# Altium PCB 软排转接.PcbDoc
Units mm, origin at the board's own origin, x right, y up, seen from the top; angles counter-clockwise.
Board outline 32 x 73.79 mm, 2 copper layers (Top Layer, Bottom Layer); 11 components, 73 nets, 188 pads, 112 vias.
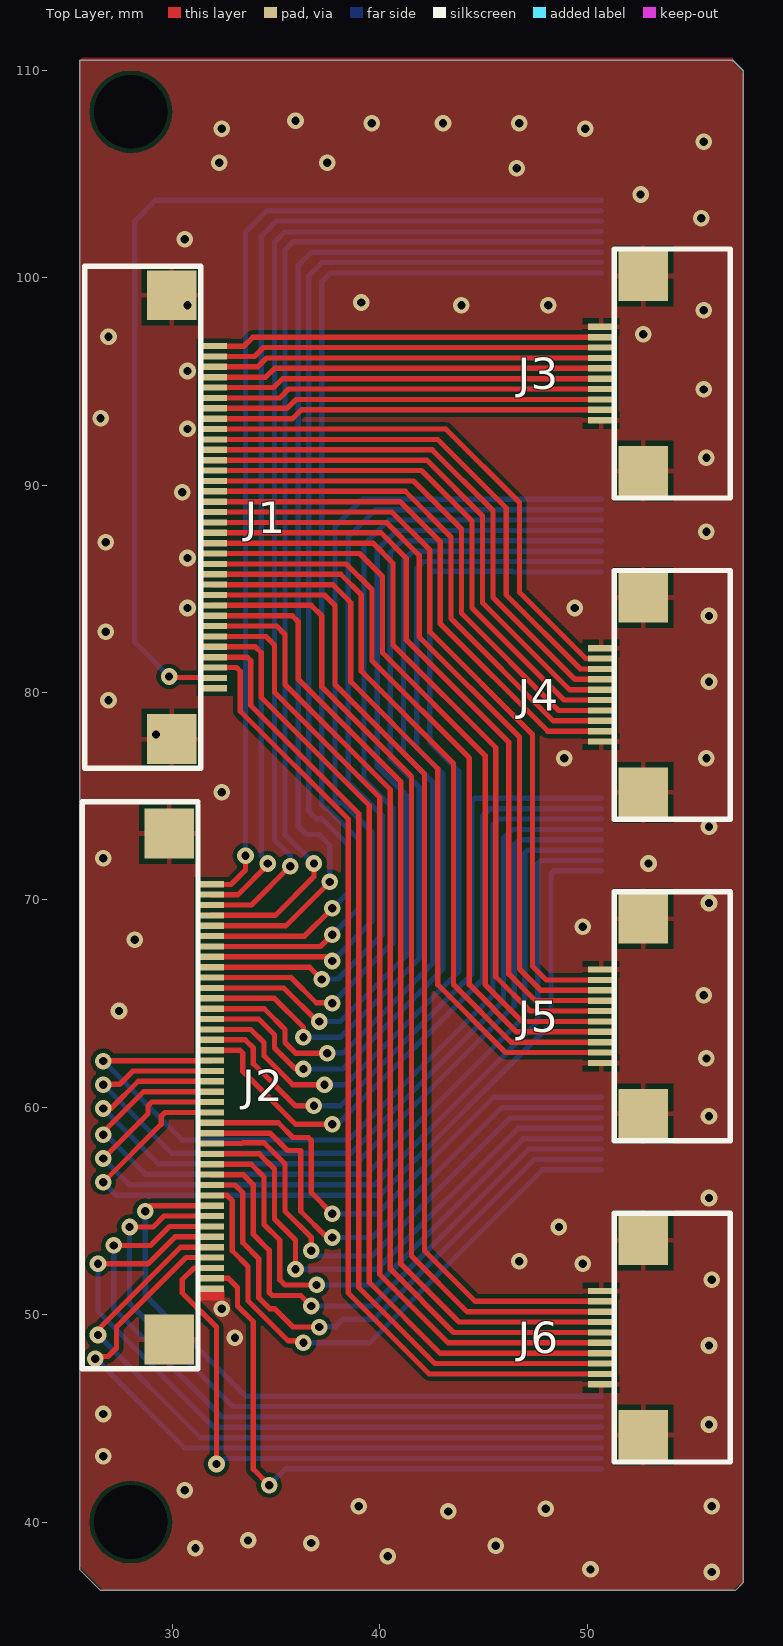
[diagram p0: Top Layer view]
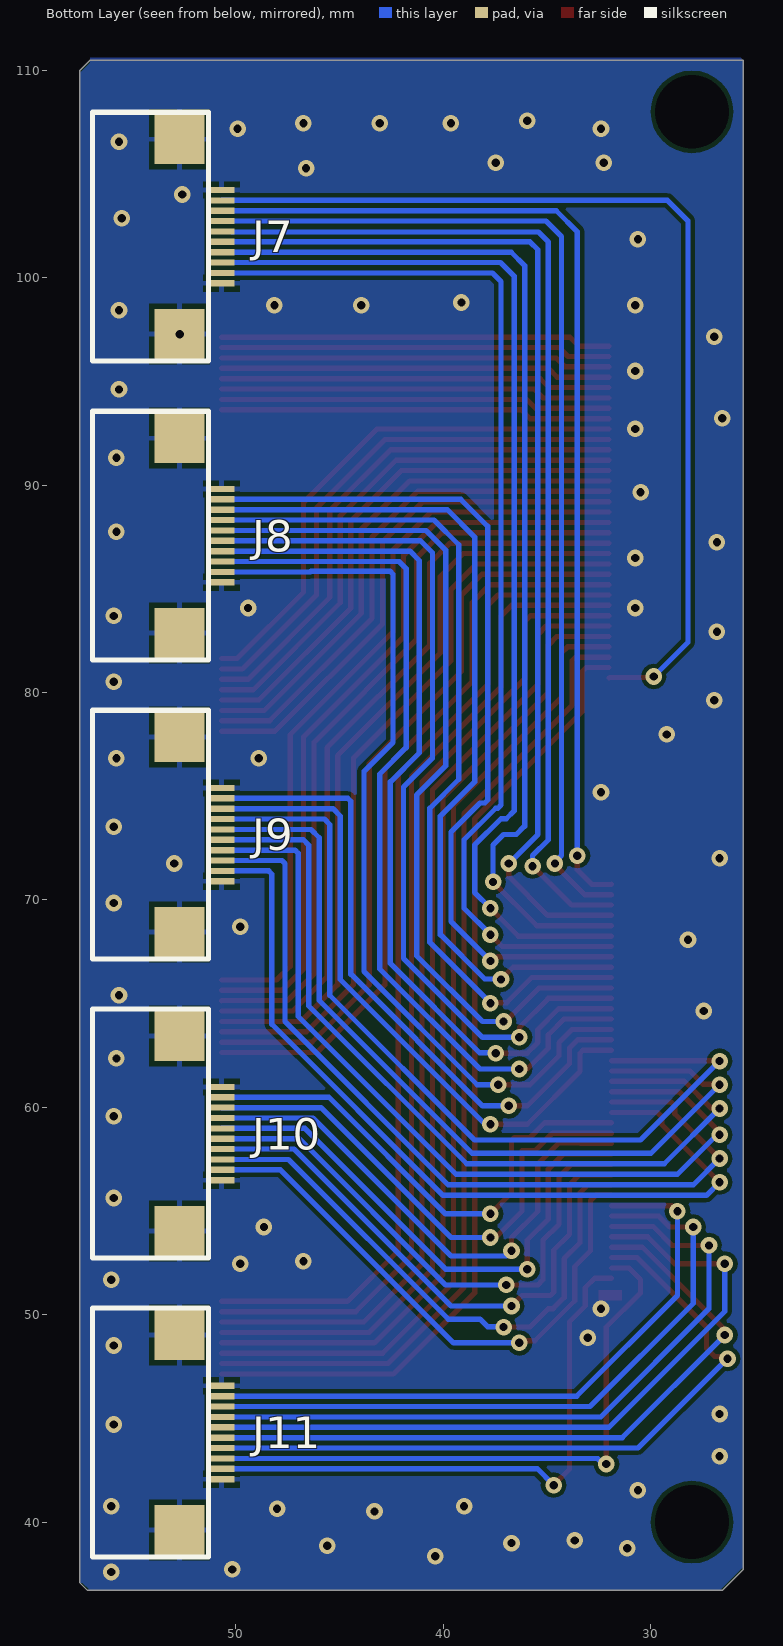
[diagram p1: Bottom Layer view, seen from below]

## Layer stack, top to bottom
Top Solder: solder mask 0.0102, Solder Resist, Dk 3.5
Top Layer: signal copper 0.0356
Dielectric 1: dielectric 0.32, FR-4, Dk 4.8
Bottom Layer: signal copper 0.0356
Bottom Solder: solder mask 0.0102, Solder Resist, Dk 3.5

## Board outline
26.543,36.703 25.527,37.719 25.527,110.49 57.023,110.49 57.531,109.982 57.531,37.084 57.15,36.703

## Design rules (kind name [scope] priority, off if disabled: settings)
Clearance [All] p1: gap=0.2 ignorepadtopadclearanceinfootprint=FALSE
PlaneConnect [All] p1: pad.planeconnectstyle=Relief pad.reliefexpansion=0.508 pad.reliefentries=4 pad.reliefconductorwidth=0.254 pad.reliefairgap=0.254 via.planeconnectstyle=Direct via.reliefexpansion=0.508 via.reliefentries=4 via.reliefconductorwidth=0.254 via.reliefairgap=0.254
PolygonConnect [All] p1: thpad.connectstyle=Relief thpad.reliefconductorwidth=0.254 thpad.reliefentries=4 thpad.polygonreliefangle="90 Angle" thpad.airgapwidth=0.254 smdpad.connectstyle=Relief smdpad.reliefconductorwidth=0.254 smdpad.reliefentries=4 smdpad.polygonreliefangle="90 Angle" smdpad.airgapwidth=0.254 via.connectstyle=Direct via.reliefconductorwidth=0.254 via.reliefentries=4 via.polygonreliefangle="90 Angle" via.airgapwidth=0.254
RoutingVias [All] p1: holewidth=0.4 width=0.8 viastyle="Through Hole" minholewidth=0.4 minwidth=0.8 maxholewidth=0.4 maxwidth=0.8
SolderMaskExpansion [All] p1: expansion=0.102
Width [All] p1: maxlimit=0.254 minlimit=0.254 preferedwidth=0.254
29 further rules are at their usual default settings.

## Classes and differential pairs
net class routine: NetJ1_1 NetJ1_2 NetJ1_3 NetJ1_4 NetJ1_5 NetJ1_6 NetJ1_7 NetJ1_8 NetJ1_9 NetJ1_10 NetJ1_11 NetJ1_12 NetJ1_13 NetJ1_14 NetJ1_15 NetJ1_16 NetJ1_17 NetJ1_18 NetJ1_19 NetJ1_20 NetJ1_21 NetJ1_22 NetJ1_23 NetJ1_24 NetJ1_25 NetJ1_26 NetJ1_27 NetJ1_28 NetJ1_29 NetJ1_30 NetJ1_31 NetJ1_32 NetJ1_33 NetJ2_1 NetJ2_2 NetJ2_3 NetJ2_4 NetJ2_5 NetJ2_6 NetJ2_7 NetJ2_8 NetJ2_9 NetJ2_10 NetJ2_11 NetJ2_12 NetJ2_13 NetJ2_14 NetJ2_15 NetJ2_16 NetJ2_17 NetJ2_18 NetJ2_19 NetJ2_20 NetJ2_21 NetJ2_22 NetJ2_23 NetJ2_24 NetJ2_25 NetJ2_26 NetJ2_27 NetJ2_28 NetJ2_29 NetJ2_30 NetJ2_31 NetJ2_32 NetJ2_33 NetJ2_34 NetJ2_35 NetJ2_36 NetJ2_37 NetJ2_38 NetJ2_39

## Components (designator, comment, footprint, x,y, rotation, side; value= is the part's Value field where it differs from the comment)
J1 "软排座" 34P软排线 32.004,88.452 r270 top
J2 "软排座" 40P软排线 31.877,61.004 r270 top
J3 "软排座" 10P软排线(逆) 50.68,95.381 r90 top
J4 "软排座" 10P软排线(逆) 50.68,79.885 r90 top
J5 "软排座" 10P软排线(逆) 50.68,64.39 r90 top
J6 "软排座" 10P软排线(逆) 50.68,48.894 r90 top
J7 "软排座" 10P软排线 50.68,101.98 r270 bottom
J8 "软排座" 10P软排线 50.68,87.565 r270 bottom
J9 "软排座" 10P软排线 50.68,73.149 r270 bottom
J10 "软排座" 10P软排线 50.68,58.734 r270 bottom
J11 "软排座" 10P软排线 50.68,44.319 r270 bottom

## Footprints (in the part's own frame and the unit in brackets; to place one, negate y for a bottom-side part, rotate by r counter-clockwise, add the part's x,y. Pads: shape width x height; smd on the part's side, far side on the other; paste and mask are expansions set on the pad)
10P软排线 [mm] "10P"
  rect 0.3x1.25 smd: 1(-2.25,0) 2(-1.75,0) 3(-1.25,0) 4(-0.75,0) 5(-0.25,0) 6(0.25,0) 7(0.75,0) 8(1.25,0) 9(1.75,0) 10(2.25,0)
  rect 2.4x2.4 smd: ""(-4.7,-2.025) ""(4.7,-2.025)
  silkscreen extent -6,-6.22 6,-0.64
10P软排线(逆) [mm] "10P"
  rect 0.3x1.25 smd: 1(2.25,0) 2(1.75,0) 3(1.25,0) 4(0.75,0) 5(0.25,0) 6(-0.25,0) 7(-0.75,0) 8(-1.25,0) 9(-1.75,0) 10(-2.25,0)
  rect 2.4x2.4 smd: ""(-4.7,-2.025) ""(4.7,-2.025)
  silkscreen extent -6,-6.22 6,-0.64
34P软排线 [mm] "34P"
  rect 0.3x1.25 smd: 1(-8.25,0) 2(-7.75,0) 3(-7.25,0) 4(-6.75,0) 5(-6.25,0) 6(-5.75,0) 7(-5.25,0) 8(-4.75,0) 9(-4.25,0) 10(-3.75,0) 11(-3.25,0) 12(-2.75,0) 13(-2.25,0) 14(-1.75,0) 15(-1.25,0) 16(-0.75,0) 17(-0.25,0) 18(0.25,0) 19(0.75,0) 20(1.25,0) 21(1.75,0) 22(2.25,0) 23(2.75,0) 24(3.25,0) 25(3.75,0) 26(4.25,0) 27(4.75,0) 28(5.25,0) 29(5.75,0) 30(6.25,0) 31(6.75,0) 32(7.25,0) 33(7.75,0) 34(8.25,0)
  rect 2.4x2.4 smd: ""(-10.7,-2.025) ""(10.7,-2.025)
  silkscreen extent -12.1,-6.22 12.1,-0.63
40P软排线 [mm] "40P"
  rect 0.3x1.25 smd: 1(-9.75,0) 2(-9.25,0) 3(-8.75,0) 4(-8.25,0) 5(-7.75,0) 6(-7.25,0) 7(-6.75,0) 8(-6.25,0) 9(-5.75,0) 10(-5.25,0) 11(-4.75,0) 12(-4.25,0) 13(-3.75,0) 14(-3.25,0) 15(-2.75,0) 16(-2.25,0) 17(-1.75,0) 18(-1.25,0) 19(-0.75,0) 20(-0.25,0) 21(0.25,0) 22(0.75,0) 23(1.25,0) 24(1.75,0) 25(2.25,0) 26(2.75,0) 27(3.25,0) 28(3.75,0) 29(4.25,0) 30(4.75,0) 31(5.25,0) 32(5.75,0) 33(6.25,0) 34(6.75,0) 35(7.25,0) 36(7.75,0) 37(8.25,0) 38(8.75,0) 39(9.25,0) 40(9.75,0)
  rect 2.4x2.4 smd: ""(-12.2,-2.025) ""(12.2,-2.025)
  silkscreen extent -13.73,-6.22 13.61,-0.63

## Part data
J1: library part 34P
J2: library part 40P
J3 J4 J5 J6 J7 J8 J9 J10 J11: library part 10P

## Free pads (board coordinates)
  rect 1.2x0.8 hole 3.556: ""(28,40) ""(28,108)

## Via types
v1: diameter 0.8, hole 0.4, Top Layer to Bottom Layer, tented both sides, 112 vias

## Nets (pads, with @x,y where several pads share a name; then routed paths per layer and width w, separated by ;. In a path a pad name is that pad's centre, name@x,y a point inside that pad or via, vN(x,y) a via of type N, cw(c..) or ccw(c..) an arc to the next point about the centre after c; other vN are vias at no path point)
GND: J1. J2. J2.40 J3. J3.1 J3.10 J4. J4.1 J4.10 J5. J5.1 J5.10 J6. J6.1 J6.10 J7. J7.1 J7.10 J8. J8.1 J8.10 J9. J9.1 J9.10 J10. J10.1 J10.10 J11. J11.1 J11.10
  other v1: 56.007,37.592 50.165,37.719 40.386,38.354 31.115,38.735 45.593,38.862 36.703,38.989 33.655,39.116 43.307,40.513 48.006,40.64 38.989,40.767 56.007,40.767 30.607,41.529 26.67,43.18 55.88,44.704 26.67,45.212 55.88,48.514 33.02,48.895 32.385,50.292 56.007,51.689 49.784,52.451 46.736,52.578 48.641,54.229 55.88,55.626 55.88,59.563 55.753,62.357 27.432,64.643 55.626,65.405 28.194,68.072 49.784,68.707 55.88,69.85 52.959,71.755 26.67,72.009 55.88,73.533 32.385,75.184 48.895,76.835 55.753,76.835 29.21,77.978 26.924,79.629 55.88,80.518 26.797,82.931 55.88,83.693 30.734,84.074 49.403,84.074 30.734,86.487 26.797,87.249 55.753,87.757 30.48,89.662 55.753,91.313 30.734,92.71 26.543,93.218 55.626,94.615 30.734,95.504 26.924,97.155 52.705,97.28 55.626,98.425 30.734,98.679 43.942,98.679 48.133,98.679 39.116,98.806 30.607,101.854 55.499,102.87 52.578,104.013 46.609,105.283 32.258,105.537 37.465,105.537 55.626,106.553 32.385,107.188 49.911,107.188 39.624,107.442 43.053,107.442 46.736,107.442 35.941,107.569
NetJ1_1: J1.1 J3.2 | length 18.9
  Top Layer w0.254: J1.1 33.456,96.702 33.885,97.131 J3.2
NetJ1_2: J1.2 J3.3 | length 18.9
  Top Layer w0.254: J1.2 33.972,96.202 34.401,96.631 J3.3
NetJ1_3: J1.3 J3.4 | length 18.9
  Top Layer w0.254: J1.3 34.115,95.702 34.544,96.131 J3.4
NetJ1_4: J1.4 J3.5 | length 18.9
  Top Layer w0.254: J1.4 34.496,95.202 34.925,95.631 J3.5
NetJ1_5: J1.5 J3.6 | length 18.9
  Top Layer w0.254: J1.5 34.885,94.702 35.314,95.131 J3.6
NetJ1_6: J1.6 J3.7 | length 18.9
  Top Layer w0.254: J1.6 35.179,94.202 35.608,94.631 J3.7
NetJ1_7: J1.7 J3.8 | length 18.9
  Top Layer w0.254: J1.7 35.536,93.702 35.965,94.131 J3.8
NetJ1_8: J1.8 J3.9 | length 18.9
  Top Layer w0.254: J1.8 35.798,93.202 36.227,93.631 J3.9
NetJ1_9: J1.9 J4.2 | length 25.8
  Top Layer w0.254: J1.9 43.188,92.702 46.736,89.154 46.736,84.836 49.937,81.635 J4.2
NetJ1_10: J1.10 J4.3 | length 25.7
  Top Layer w0.254: J1.10 42.799,92.202 46.101,88.9 46.101,84.709 49.675,81.135 J4.3
NetJ1_11: J1.11 J4.4 | length 25.7
  Top Layer w0.254: J1.11 42.537,91.702 45.466,88.773 45.466,84.582 49.413,80.635 J4.4
NetJ1_12: J1.12 J4.5 | length 25.7
  Top Layer w0.254: J1.12 42.275,91.202 44.958,88.519 44.958,84.328 49.151,80.135 J4.5
NetJ1_13: J1.13 J4.6 | length 25.7
  Top Layer w0.254: J1.13 42.013,90.702 44.45,88.265 44.45,84.074 48.889,79.635 J4.6
NetJ1_14: J1.14 J4.7 | length 25.6
  Top Layer w0.254: J1.14 41.624,90.202 43.942,87.884 43.942,83.82 48.627,79.135 J4.7
NetJ1_15: J1.15 J4.8 | length 25.6
  Top Layer w0.254: J1.15 41.235,89.702 43.434,87.503 43.434,83.566 48.365,78.635 J4.8
NetJ1_16: J1.16 J4.9 | length 25.6
  Top Layer w0.254: J1.16 40.973,89.202 42.926,87.249 42.926,83.312 48.103,78.135 J4.9
NetJ1_17: J1.17 J5.2 | length 36.9
  Top Layer w0.254: J1.17 40.584,88.702 42.418,86.868 42.418,82.931 47.371,77.978 47.371,66.802 48.033,66.14 J5.2
NetJ1_18: J1.18 J5.3 | length 36.9
  Top Layer w0.254: J1.18 40.322,88.202 41.91,86.614 41.91,82.677 46.736,77.851 46.736,66.675 47.771,65.64 J5.3
NetJ1_19: J1.19 J5.4 | length 36.9
  Top Layer w0.254: J1.19 40.06,87.702 41.275,86.487 41.275,82.55 46.228,77.597 46.228,66.421 47.498,65.151 50.669,65.151 J5.4
NetJ1_20: J1.20 J5.5 | length 36.8
  Top Layer w0.254: J1.20 39.671,87.202 40.64,86.233 40.64,82.296 45.593,77.343 45.593,66.294 47.247,64.64 J5.5
NetJ1_21: J1.21 J5.6 | length 36.7
  Top Layer w0.254: J1.21 39.028,86.702 40.132,85.598 40.132,81.915 45.085,76.962 45.085,65.913 46.858,64.14 J5.6
NetJ1_22: J1.22 J5.7 | length 36.4
  Top Layer w0.254: J1.22 38.385,86.202 39.624,84.963 39.624,81.534 44.323,76.835 44.323,65.913 46.596,63.64 J5.7
NetJ1_23: J1.23 J5.8 | length 36.4
  Top Layer w0.254: J1.23 38.123,85.702 39.116,84.709 39.116,81.026 43.561,76.581 43.561,65.913 46.334,63.14 J5.8
NetJ1_24: J1.24 J5.9 | length 36.4
  Top Layer w0.254: J1.24 37.734,85.202 38.608,84.328 38.608,80.518 42.799,76.327 42.799,65.913 46.072,62.64 J5.9
NetJ1_25: J1.25 J6.2 | length 48.5
  Top Layer w0.254: J1.25 37.345,84.702 37.846,84.201 37.846,80.391 42.164,76.073 42.164,53.086 44.606,50.644 J6.2
NetJ1_26: J1.26 J6.3 | length 48.3
  Top Layer w0.254: J1.26 36.702,84.202 37.211,83.693 37.211,80.264 41.529,75.946 41.529,52.832 44.217,50.144 J6.3
NetJ1_27: J1.27 J6.4 | length 48
  Top Layer w0.254: J1.27 35.783,83.702 36.068,83.417 36.068,80.645 41.021,75.692 41.021,52.451 43.828,49.644 J6.4
NetJ1_28: J1.28 J6.5 | length 47.7
  Top Layer w0.254: J1.28 35.035,83.202 35.433,82.804 35.433,80.391 40.513,75.311 40.513,52.197 43.566,49.144 J6.5
NetJ1_29: J1.29 J6.6 | length 47.6
  Top Layer w0.254: J1.29 34.519,82.702 34.925,82.296 34.925,80.01 40.005,74.93 40.005,51.943 43.304,48.644 J6.6
NetJ1_30: J1.30 J6.7 | length 47.5
  Top Layer w0.254: J1.30 34.003,82.202 34.29,81.915 34.29,79.756 39.497,74.549 39.497,51.562 42.915,48.144 J6.7
NetJ1_31: J1.31 J6.8 | length 47.4
  Top Layer w0.254: J1.31 33.614,81.702 33.782,81.534 33.782,79.375 38.989,74.168 38.989,51.308 42.653,47.644 J6.8
NetJ1_32: J1.32 J6.9 | length 47.3
  Top Layer w0.254: J1.32 33.098,81.202 33.274,81.026 33.274,79.099 38.481,73.892 38.481,51.054 42.391,47.144 J6.9
NetJ1_33: J1.33 J7.2 | length 47.7
  Top Layer w0.254: v1(29.845,80.772) 29.892,80.725 31.981,80.725 J1.33
  Bottom Layer w0.254: v1(29.845,80.772) 28.194,82.423 28.194,102.743 29.181,103.73 J7.2
NetJ2_1: J2.1 J7.3 | length 50.3
  Top Layer w0.254: J2.1 31.884,70.746 32.824,70.746 33.528,71.45 v1(33.528,72.136)
  Bottom Layer w0.254: v1(33.528,72.136) 33.528,102.213 34.545,103.23 J7.3
NetJ2_2: J2.2 J7.4 | length 50.5
  Top Layer w0.254: J2.2 31.889,70.243 33.159,70.243 v1@34.671,71.755
  Bottom Layer w0.254: v1@34.671,71.755 34.29,72.136 34.29,101.981 35.039,102.73 J7.4
  other v1: 34.608,71.755
NetJ2_3: J2.3 J7.5 | length 51
  Top Layer w0.254: J2.3 33.813,69.754 v1(35.687,71.628)
  Bottom Layer w0.254: v1(35.687,71.628) 35.687,72.136 34.925,72.898 34.925,101.727 35.405,102.207 50.182,102.207 50.205,102.23 J7.5
NetJ2_4: J2.4 J7.6 | length 51.9
  Top Layer w0.254: J2.4 34.964,69.254 36.83,71.12 v1(36.83,71.755)
  Bottom Layer w0.254: v1(36.83,71.755) 35.433,73.152 35.433,101.346 35.817,101.73 J7.6
NetJ2_5: J2.5 J7.7 | length 52.2
  Top Layer w0.254: J2.5 35.48,68.754 v1(37.592,70.866)
  Bottom Layer w0.254: v1(37.592,70.866) 37.592,72.644 37.084,73.152 36.471,73.152 36.068,73.555 36.068,100.584 36.714,101.23 J7.7
NetJ2_6: J2.6 J7.8 | length 52.5
  Top Layer w0.254: J2.6 36.377,68.254 v1(37.719,69.596)
  Bottom Layer w0.254: v1(37.719,69.596) 38.481,70.358 38.481,72.644 37.211,73.914 36.957,73.914 36.576,74.295 36.576,100.076 37.23,100.73 J7.8
NetJ2_7: J2.7 J7.9 | length 52.5
  Top Layer w0.254: J2.7 37.147,67.754 v1(37.719,68.326)
  Bottom Layer w0.254: v1(37.719,68.326) 38.989,69.596 38.989,72.898 37.465,74.422 37.36,74.422 37.211,74.571 37.211,99.822 37.619,100.23 J7.9
NetJ2_8: J2.8 J8.2 | length 41.9
  Top Layer w0.254: J2.8 37.373,67.254 37.571,67.056 v1(37.719,67.056)
  Bottom Layer w0.254: v1(37.719,67.056) 39.624,68.961 39.624,73.279 38.227,74.676 37.995,74.676 37.846,74.825 37.846,88.011 39.15,89.315 J8.2
NetJ2_9: J2.9 J8.3 | length 42
  Top Layer w0.254: J2.9 36.624,66.754 v1(37.211,66.167)
  Bottom Layer w0.254: v1(37.211,66.167) 37.23,66.186 37.992,66.186 40.132,68.326 40.132,74.041 38.481,75.692 38.481,87.503 39.793,88.815 J8.3
NetJ2_10: J2.10 J8.4 | length 42.2
  Top Layer w0.254: J2.10 35.727,66.254 36.938,65.043 37.7,65.043 v1(37.719,65.024)
  Bottom Layer w0.254: v1(37.719,65.024) 40.64,67.945 40.64,74.422 39.243,75.819 39.243,87.122 40.436,88.315 J8.4
NetJ2_11: J2.11 J8.5 | length 42.7
  Top Layer w0.254: J2.11 35.377,65.754 36.996,64.135 v1(37.084,64.135)
  Bottom Layer w0.254: v1(37.084,64.135) 38.1,64.135 41.275,67.31 41.275,75.057 39.878,76.454 39.878,86.868 40.825,87.815 J8.5
NetJ2_12: J2.12 J8.6 | length 43.2
  Top Layer w0.254: J2.12 34.927,65.254 36.322,63.859 v1(36.322,63.373)
  Bottom Layer w0.254: v1(36.322,63.373) 38.1,63.373 41.91,67.183 41.91,75.438 40.513,76.835 40.513,86.741 41.087,87.315 J8.6
NetJ2_13: J2.13 J8.7 | length 43.4
  Top Layer w0.254: J2.13 34.433,64.754 35.433,63.754 35.433,63.119 35.941,62.611 v1(37.465,62.611)
  Bottom Layer w0.254: v1(37.465,62.611) 37.484,62.63 38.246,62.63 42.545,66.929 42.545,75.692 41.148,77.089 41.148,86.36 41.603,86.815 J8.7
NetJ2_14: J2.14 J8.8 | length 43.4
  Top Layer w0.254: J2.14 34.171,64.254 34.925,63.5 34.925,62.865 35.941,61.849 v1(36.322,61.849)
  Bottom Layer w0.254: v1(36.322,61.849) 38.227,61.849 43.053,66.675 43.053,76.073 41.783,77.343 41.783,85.979 42.119,86.315 J8.8
NetJ2_15: J2.15 J8.9 | length 43.7
  Top Layer w0.254: J2.15 33.782,63.754 34.417,63.119 34.417,62.484 35.814,61.087 v1(37.338,61.087)
  Bottom Layer w0.254: v1(37.338,61.087) 38.354,61.087 43.815,66.548 43.815,76.2 42.418,77.597 42.418,85.703 42.567,85.852 46.367,85.852 46.405,85.815 J8.9
NetJ2_16: J2.16 J9.2 | length 31.6
  Top Layer w0.254: J2.16 33.52,63.254 33.909,62.865 33.909,62.103 35.941,60.071 v1(36.83,60.071)
  Bottom Layer w0.254: v1(36.83,60.071) 38.1,60.071 44.45,66.421 44.45,74.751 44.599,74.9 J9.2
NetJ2_17: J2.17 J9.3 | length 31.7
  Top Layer w0.254: J2.17 33.252,62.754 33.401,62.605 33.401,61.722 35.941,59.182 v1(37.719,59.182)
  Bottom Layer w0.254: v1(37.719,59.182) 37.973,59.182 44.958,66.167 44.958,74.041 45.316,74.399 J9.3
NetJ2_18: J2.18 J9.4 | length 42
  Top Layer w0.254: v1(26.67,62.23) 26.682,62.242 31.865,62.242 J2.18
  Bottom Layer w0.254: v1(26.67,62.23) 30.48,58.42 38.481,58.42 45.466,65.405 45.466,73.638 45.727,73.9 J9.4
NetJ2_19: J2.19 J9.5 | length 41.9
  Top Layer w0.254: v1(26.67,61.087) 26.689,61.106 27.451,61.106 28.099,61.754 J2.19
  Bottom Layer w0.254: v1(26.67,61.087) 29.972,57.785 38.608,57.785 45.974,65.151 45.974,72.997 46.377,73.399 J9.5
NetJ2_20: J2.20 J9.6 | length 41.9
  Top Layer w0.254: v1(26.67,59.944) 27.051,59.944 28.361,61.254 J2.20
  Bottom Layer w0.254: v1(26.67,59.944) 29.337,57.277 38.862,57.277 46.482,64.897 46.482,72.644 46.738,72.9 J9.6
NetJ2_21: J2.21 J9.7 | length 42
  Top Layer w0.254: v1(26.67,58.674) 26.67,58.801 28.623,60.754 J2.21
  Bottom Layer w0.254: v1(26.67,58.674) 26.797,58.674 28.702,56.769 39.37,56.769 46.99,64.389 46.99,72.251 47.139,72.399 J9.7
NetJ2_22: J2.22 J9.8 | length 42
  Top Layer w0.254: v1(26.67,57.531) 28.829,59.69 28.829,60.071 29.012,60.254 J2.22
  Bottom Layer w0.254: v1(26.67,57.531) 27.94,56.261 39.751,56.261 47.625,64.135 47.625,71.751 47.774,71.899 J9.8
NetJ2_23: J2.23 J9.9 | length 41.8
  Top Layer w0.254: v1(26.67,56.388) 29.464,59.182 29.464,59.563 29.655,59.754 J2.23
  Bottom Layer w0.254: v1(26.67,56.388) 27.305,55.753 40.005,55.753 48.26,64.008 48.26,71.247 48.413,71.4 J9.9
NetJ2_24: J2.24 J10.2 | length 24.4
  Top Layer w0.254: J2.24 35.107,59.254 35.814,58.547 36.554,58.547 36.703,58.398 36.703,55.88 v1(37.719,54.864)
  Bottom Layer w0.254: v1(37.719,54.864) 39.878,54.864 45.498,60.484 J10.2
NetJ2_25: J2.25 J10.3 | length 25.2
  Top Layer w0.254: J2.25 34.718,58.754 35.56,57.912 36.195,57.912 36.195,54.991 37.465,53.721 v1(37.719,53.721)
  Bottom Layer w0.254: v1(37.719,53.721) 39.624,53.721 45.887,59.984 J10.3
NetJ2_26: J2.26 J10.4 | length 25.5
  Top Layer w0.254: J2.26 33.365,58.254 33.404,58.293 34.417,58.293 35.433,57.277 35.433,54.991 36.703,53.721 v1(36.703,53.086)
  Bottom Layer w0.254: v1(36.703,53.086) 36.957,52.832 39.624,52.832 46.276,59.484 J10.4
NetJ2_27: J2.27 J10.5 | length 26.1
  Top Layer w0.254: J2.27 34.194,57.754 34.925,57.023 34.925,54.61 35.941,53.594 v1(35.941,52.197)
  Bottom Layer w0.254: v1(35.941,52.197) 39.878,52.197 46.665,58.984 J10.5
NetJ2_28: J2.28 J10.6 | length 26.6
  Top Layer w0.254: J2.28 33.805,57.254 34.417,56.642 34.417,54.356 35.179,53.594 35.179,51.689 35.433,51.435 v1(36.957,51.435)
  Bottom Layer w0.254: v1(36.957,51.435) 39.878,51.435 46.927,58.484 J10.6
NetJ2_29: J2.29 J10.7 | length 27.2
  Top Layer w0.254: J2.29 33.416,56.754 33.909,56.261 33.909,53.87 34.671,53.108 34.671,51.076 34.82,50.927 36.195,50.927 v1(36.703,50.419)
  Bottom Layer w0.254: v1(36.703,50.419) 39.624,50.419 47.189,57.984 J10.7
NetJ2_30: J2.30 J10.8 | length 27.5
  Top Layer w0.254: J2.30 33.027,56.254 33.401,55.88 33.401,53.467 34.163,52.705 34.163,50.822 34.693,50.292 34.925,50.292 35.814,49.403 v1(37.084,49.403)
  Bottom Layer w0.254: v1(37.084,49.403) 37.103,49.422 37.865,49.422 38.227,49.784 39.751,49.784 47.451,57.484 J10.8
NetJ2_31: J2.31 J10.9 | length 27.6
  Top Layer w0.254: J2.31 32.638,55.754 32.893,55.499 32.893,53.086 33.655,52.324 33.655,50.673 35.583,48.745 36.218,48.745 v1(36.322,48.641)
  Bottom Layer w0.254: v1(36.322,48.641) 39.497,48.641 47.84,56.984 J10.9
NetJ2_32: J2.32 J11.2 | length 31.3
  Top Layer w0.254: v1(28.702,54.991) 28.965,55.254 J2.32
  Bottom Layer w0.254: v1(28.702,54.991) 28.702,50.927 33.56,46.069 J11.2
NetJ2_33: J2.33 J11.3 | length 32.6
  Top Layer w0.254: v1(27.94,54.229) 29.083,54.229 29.608,54.754 J2.33
  Bottom Layer w0.254: v1(27.94,54.229) 27.94,50.546 32.917,45.569 J11.3
NetJ2_34: J2.34 J11.4 | length 33.8
  Top Layer w0.254: v1(27.178,53.34) 28.956,53.34 29.87,54.254 J2.34
  Bottom Layer w0.254: v1(27.178,53.34) 27.178,50.292 32.401,45.069 J11.4
NetJ2_35: J2.35 J11.5 | length 34.9
  Top Layer w0.254: v1(26.416,52.451) 28.829,52.451 30.132,53.754 J2.35
  Bottom Layer w0.254: v1(26.416,52.451) 26.416,50.165 32.012,44.569 J11.5
NetJ2_36: J2.36 J11.6 | length 33.7
  Top Layer w0.254: v1(26.416,49.022) 26.416,49.276 30.394,53.254 J2.36
  Bottom Layer w0.254: v1(26.416,49.022) 31.369,44.069 J11.6
NetJ2_37: J2.37 J11.7 | length 34.4
  Top Layer w0.254: v1(26.289,47.879) 26.393,47.983 26.901,47.983 27.305,48.387 27.305,49.403 30.656,52.754 J2.37
  Bottom Layer w0.254: v1(26.289,47.879) 30.599,43.569 J11.7
NetJ2_38: J2.38 J11.8 | length 29.9
  Top Layer w0.254: J2.38 31.045,52.254 30.48,51.689 30.48,51.054 32.131,49.403 v1(32.131,42.799)
  Bottom Layer w0.254: v1(32.131,42.799) 32.279,42.799 32.549,43.069 J11.8
NetJ2_39: J2.39 J11.9 | length 27.9
  Top Layer w0.254: J2.39 32.701,51.754 33.147,51.308 33.147,50.419 33.909,49.657 33.909,42.545 v1(34.671,41.783)
  Bottom Layer w0.254: v1(34.671,41.783) 35.457,42.569 J11.9
pads on no net: J1.34

## Polygon pours and split planes (outlines as drawn)
GND on Top Layer "Top Layer-GND" (solid, remove dead copper, pour order 0): 25.527,110.49 25.654,110.617 57.023,110.617 57.023,110.363 57.531,109.855 57.531,37.084 57.404,37.084 57.023,36.703 26.67,36.703 25.527,37.846
GND on Bottom Layer "Top Layer-No Net" (solid, remove dead copper, pour order 2): 25.527,110.49 25.654,110.617 57.023,110.617 57.023,110.363 57.531,109.855 57.531,37.084 57.404,37.084 57.023,36.703 26.67,36.703 25.527,37.846

## Other copper
Top Layer:
  rectangle net GND: 31.369,50.673 32.512,51.181